# Altium PCB MP3.PcbDoc
Units mil, origin at the board's own origin, x right, y up, seen from the top; angles counter-clockwise.
Board outline 6000 x 4000 mil, 4 copper layers (Top Layer, vcc, gnd, Bottom Layer), stack 23.756 mil thick; 106 components, 156 nets, 529 pads, 47 vias.
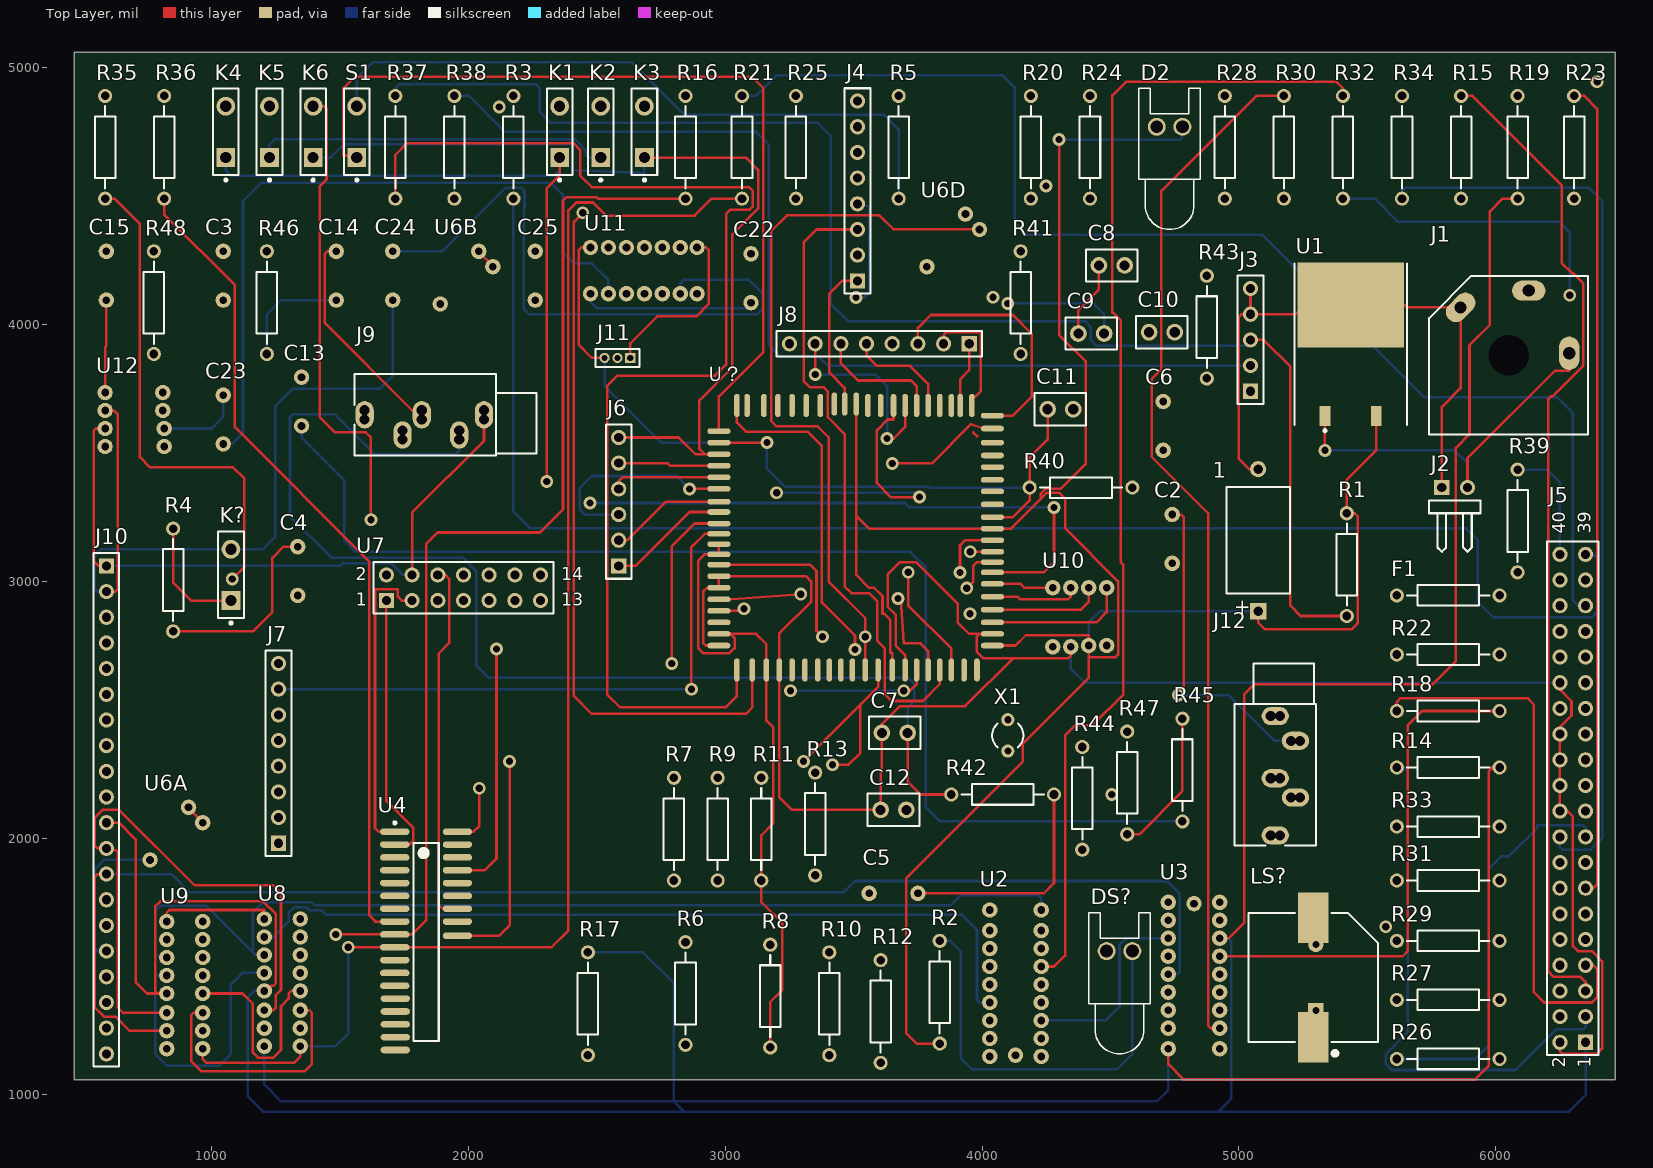
[diagram p0: Top Layer view]
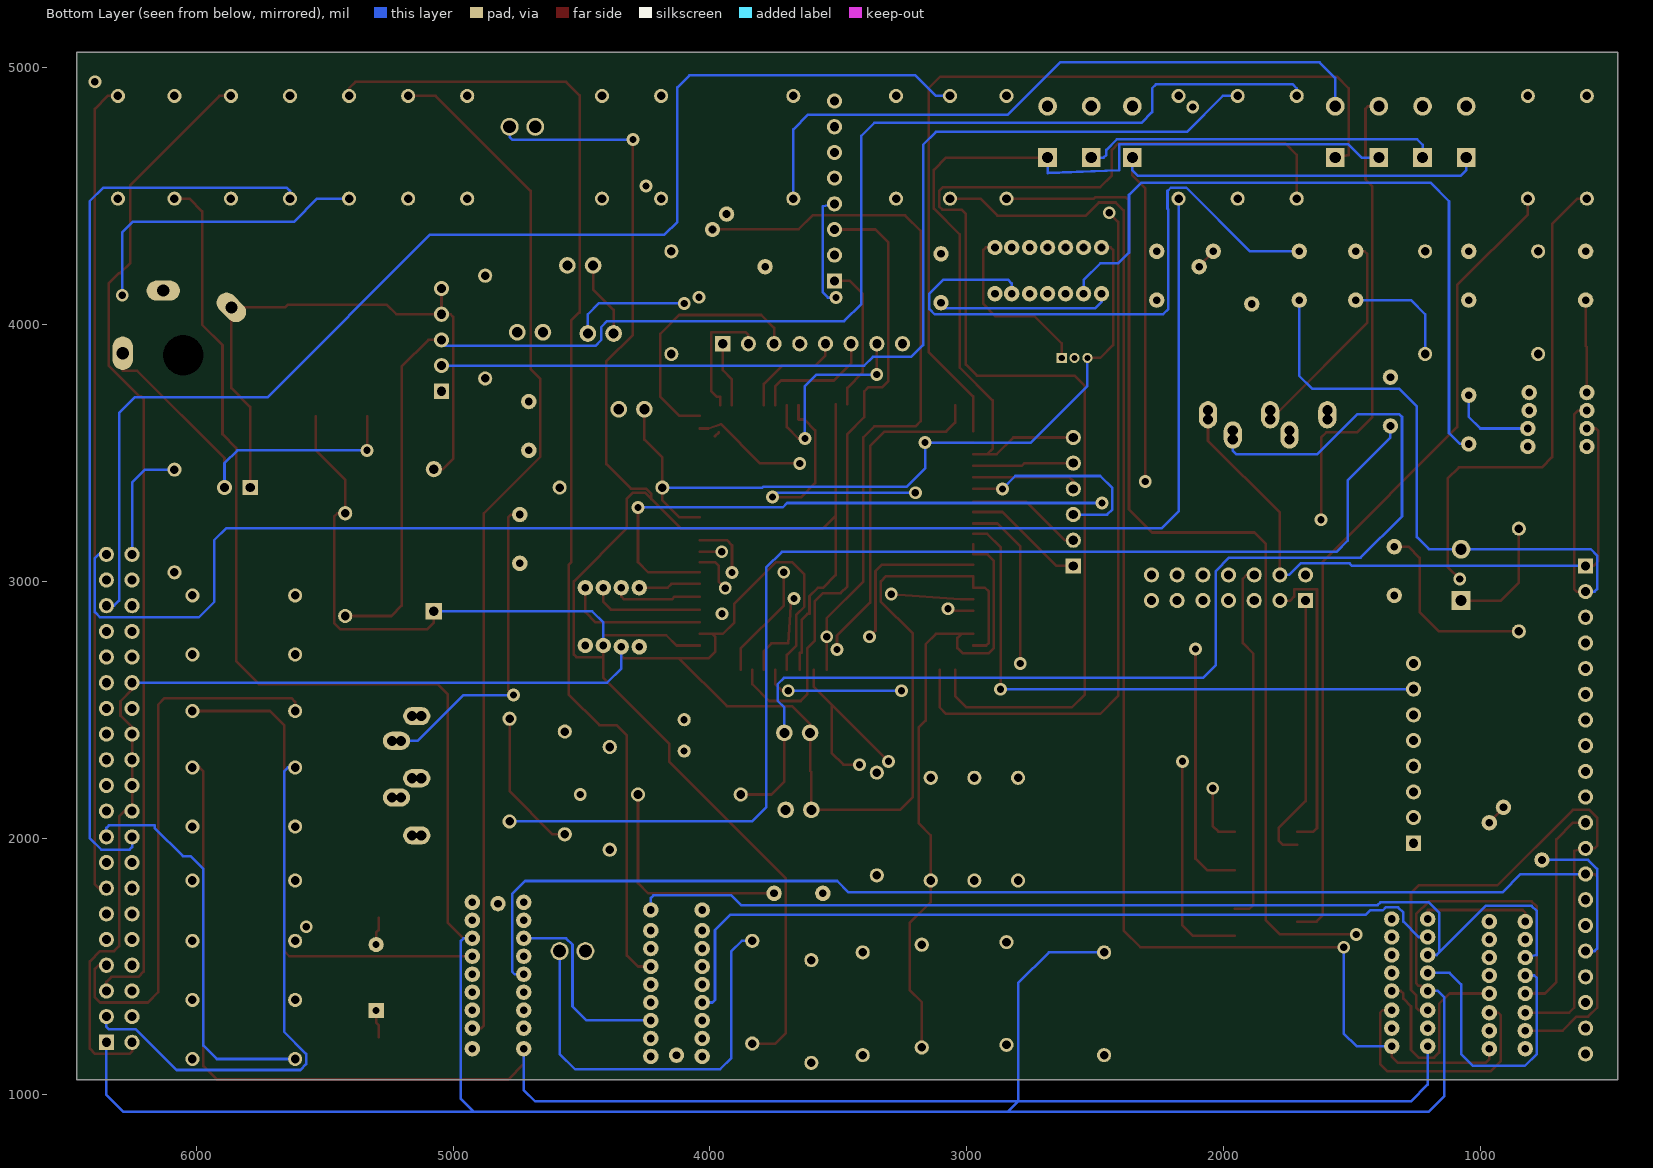
[diagram p1: Bottom Layer view, seen from below]
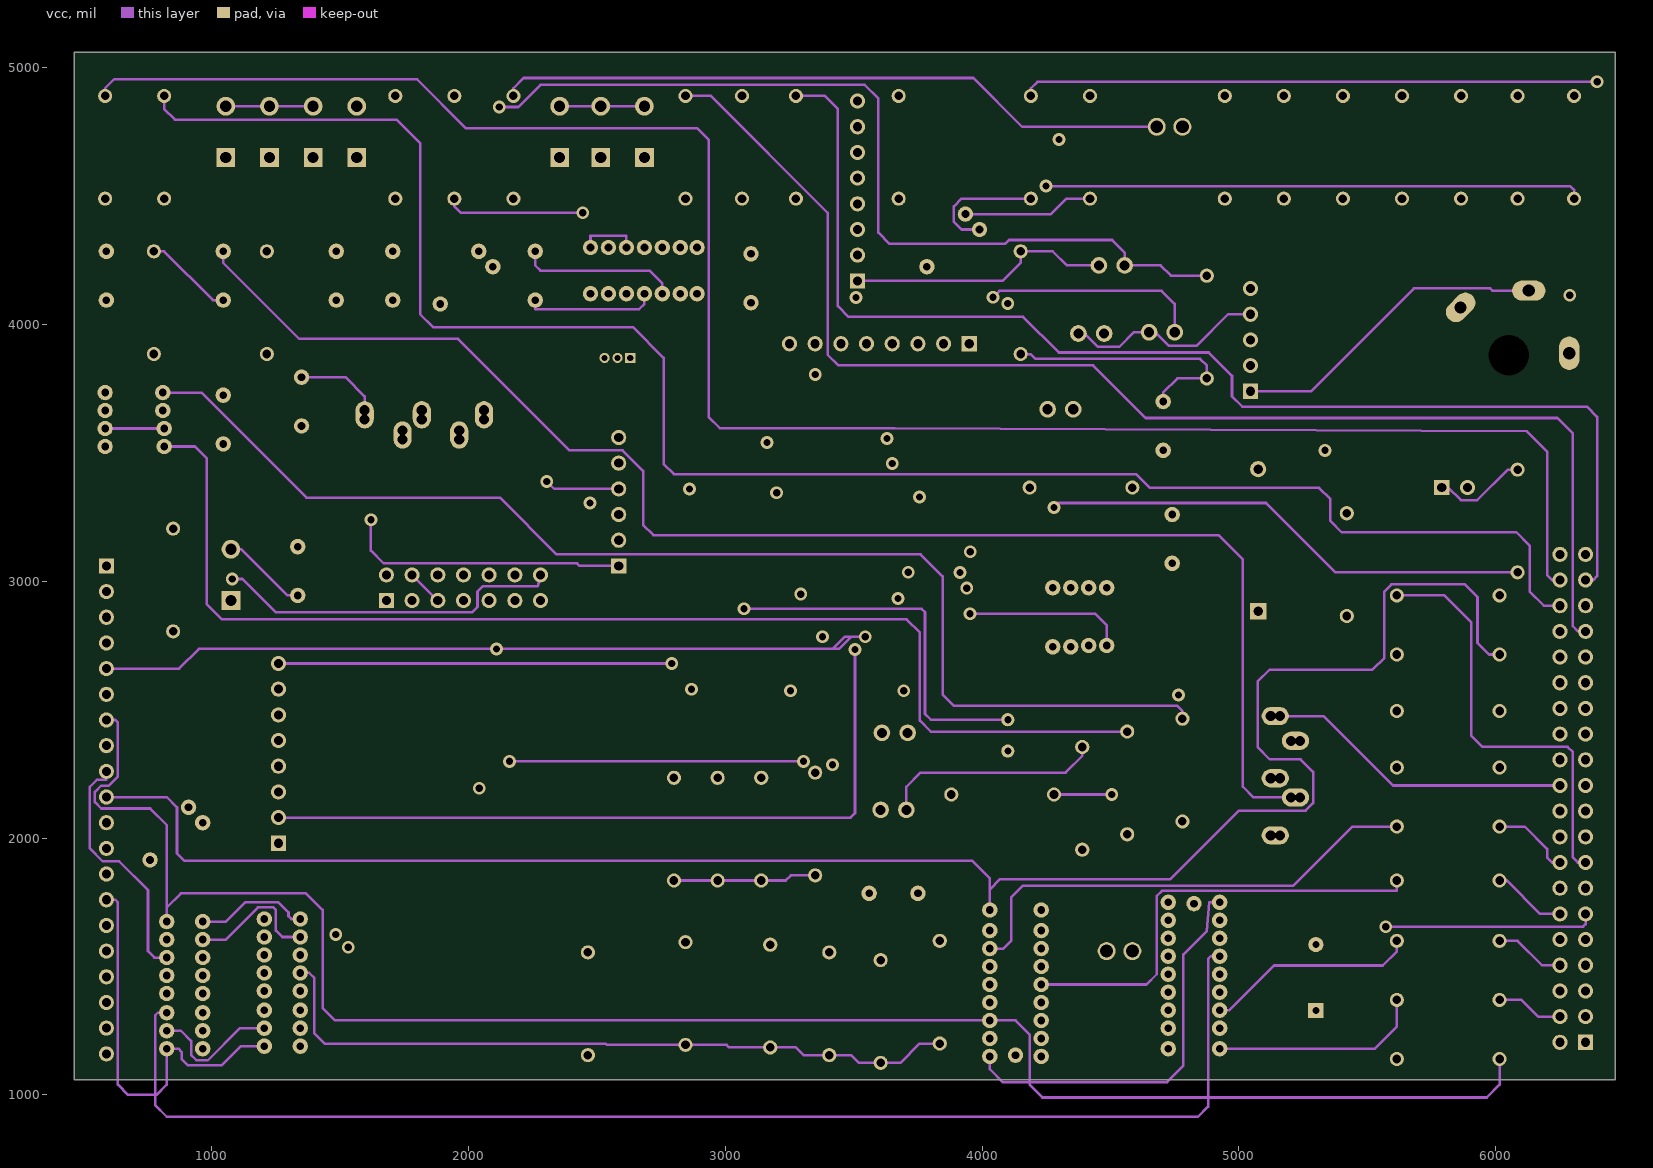
[diagram p2: vcc]
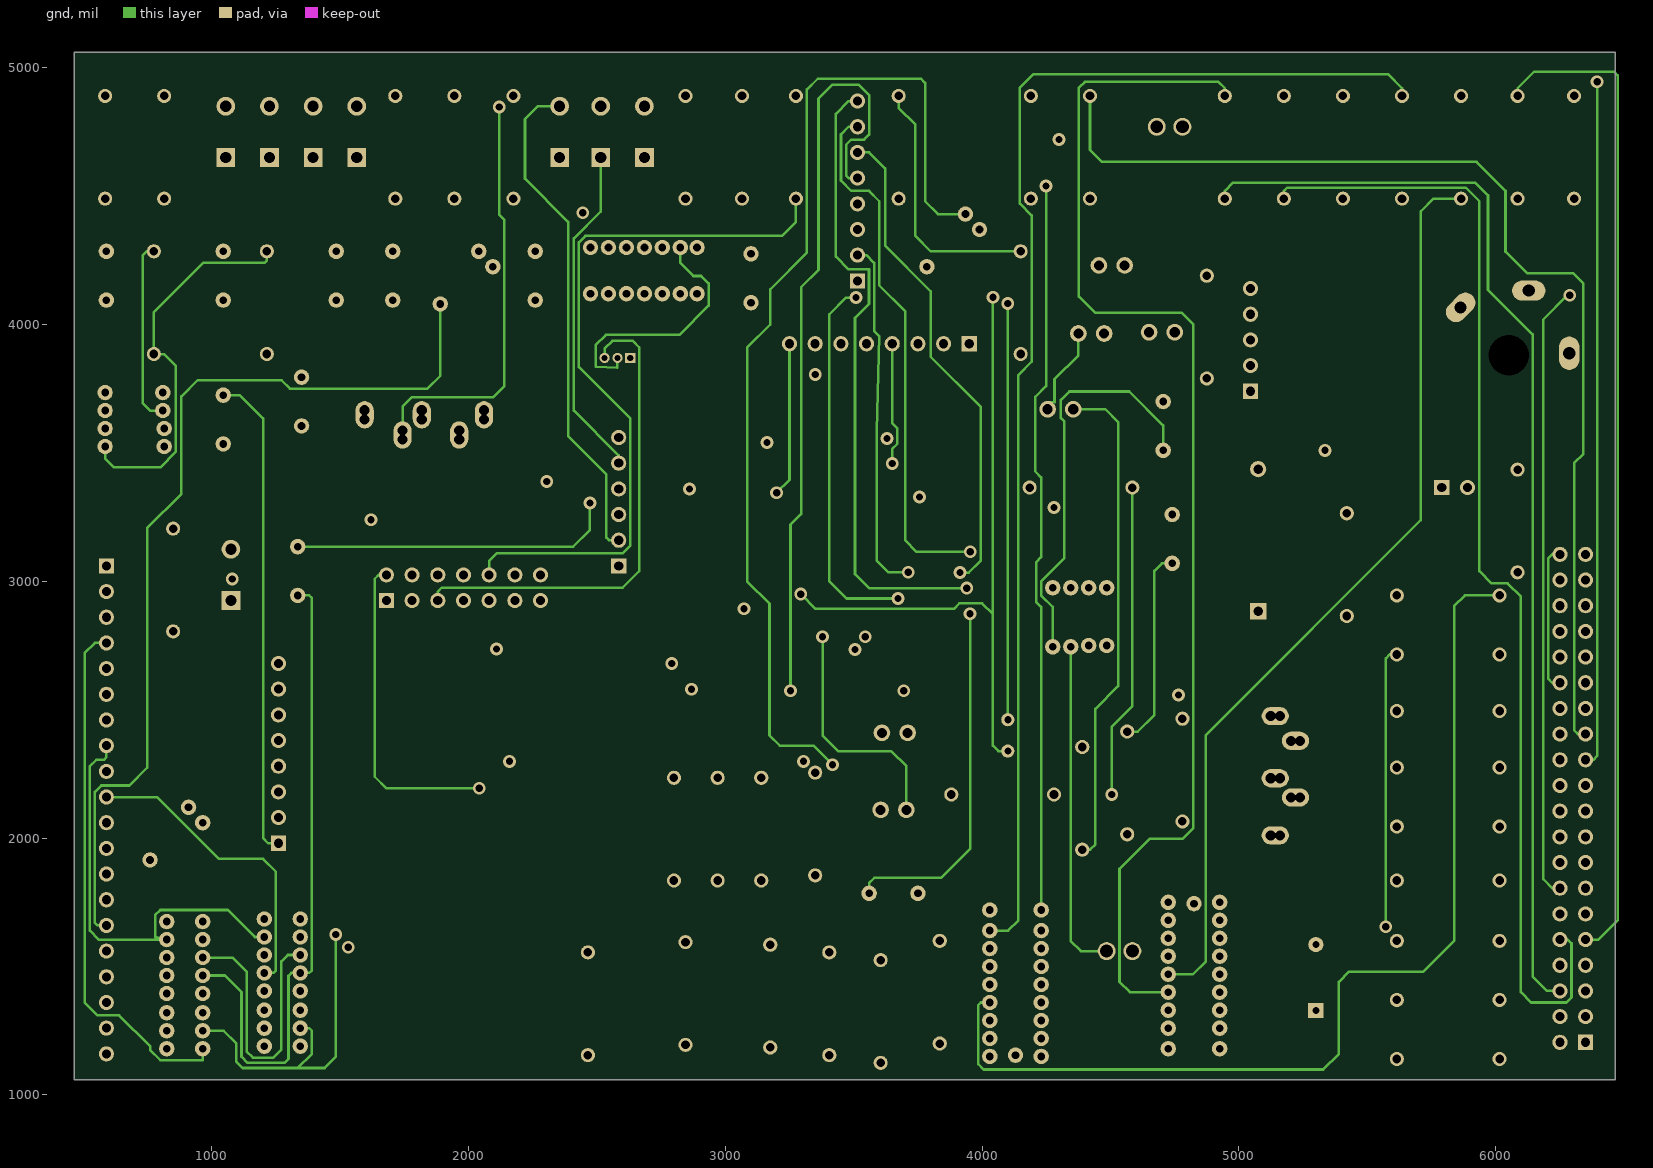
[diagram p3: gnd]

## Layer stack, top to bottom
Top Solder: solder mask 0.4, Solder Resist, Dk 3.5
Top Layer: signal copper 1.4
Dielectric 1: prepreg 2.8, PP-006, Dk 4.1
vcc: signal copper 1.3779
Dielectric1: dielectric 12.6, FR-4, Dk 4.8
gnd: signal copper 1.3779
Dielectric 2: prepreg 2.8, PP-006, Dk 4.1
Bottom Layer: signal copper 1.4
Bottom Solder: solder mask 0.4, Solder Resist, Dk 3.5

## Board outline
465,1060 6465,1060 6465,5060 465,5060

## Design rules (kind name [scope] priority, off if disabled: settings)
Clearance [All] p1: gap=10 ignorepadtopadclearanceinfootprint=FALSE except(0: Arc-Hole Track-Hole SMDPad-Hole THPad-Hole Via-Hole Fill-Hole Poly-Hole Region-Hole Text-Hole)
FabricationTestPointUsage TestPointUsage [All] p1: valid=0 allowmultiple=FALSE
FabricationTestpoint Testpoint [All] p1: side=3 testpointundercomponent=TRUE minsize=40 maxsize=100 preferedsize=60 minholesize=0 maxholesize=40 preferedholesize=32 testpointgrid=1 allowsidetop=TRUE allowsidebottom=TRUE usegrid=TRUE gridtolerance=0.01
PolygonConnect [All] p1: connectstyle=Relief reliefconductorwidth=10 reliefentries=4 polygonreliefangle="90 Angle" airgapwidth=10
RoutingVias [All] p1: holewidth=28 width=50 viastyle="Through Hole" minholewidth=28 minwidth=50 maxholewidth=28 maxwidth=50
SolderMaskExpansion [All] p1: expansion=4
Width [All] p1: maxlimit=10 minlimit=10 preferedwidth=10
28 further rules are at their usual default settings.

## Components (designator, comment, footprint, x,y, rotation, side; value= is the part's Value field where it differs from the comment)
1 "C1" CAPPA14.05-10.5x6.3 5075,3160 r90 top value=1000μF
C2 "1000μ" cap 4740,3160 r0 top
C3 "1000μ" cap 1045,4185 r0 top
C4 "1μF" cap 1335,3035 r0 top
C5 "10μ" cap 3660,1785 r90 top
C6 "10μ" cap 4705,3610 r180 top
C7 "680p" CAPR2.54-5.1x3.2 3660,2410 r0 top value=100pF
C8 "680p" CAPR2.54-5.1x3.2 4505,4230 r0 top value=100pF
C9 "10p" CAPR2.54-5.1x3.2 4425,3965 r0 top value=100pF
C10 "10p" CAPR2.54-5.1x3.2 4700,3970 r0 top value=100pF
C11 "0.01μ" CAPR2.54-5.1x3.2 4305,3670 r0 top value=100pF
C12 "2200p" CAPR2.54-5.1x3.2 3655,2110 r0 top value=100pF
C13 "0.33μ" cap 1350,3695 r0 top
C14 "0.33μ" cap 1485,4185 r0 top
C15 "1μ" cap 590,4185 r0 top
C22 "0.1μ" cap 3100,4175 r0 top
C23 "0.1μ" cap 1045,3625 r0 top
C24 "0.1μ" cap 1705,4185 r0 top
C25 "0.1μ" cap 2260,4185 r0 top
D2 "LED" LED-0 4730,4770 r0 top
DS? "LED0" LED-0 4535,1560 r0 top
F1 "Res2" AXIAL-0.4 5815,2945 r180 top value=1K
J1 "POWER" JACK/6-V3A 6050,3880 r0 top
J2 "POWER1" HDR1X2H 5790,3365 r0 top
J3 "USB" HDR1X5 5045,3740 r90 top
J4 "IO3" HDR1X8 3515,4170 r90 top
J5 "IDE" HDR2X20 6350,1205 r90 top
J6 "KEY" HDR1X6 2585,3060 r90 top
J7 "IO2" HDR1X8 1260,1980 r90 top
J8 "IO1" HDR1X8 3950,3925 r180 top
J9 "LINE OUT" ST-3150-5N 2265,3615 r270 top
J10 "LCD" HDR1X20 590,3060 r270 top
J11 "COM" MHDR1X3 2630,3870 r180 top
J12 "HEADPHONE" ST-3150-5N 5175,2680 r0 top
K1 "K1" SPST-2 2355,4750 r90 top
K2 "K2" SPST-2 2515,4750 r90 top
K3 "K3" SPST-2 2685,4750 r90 top
K4 "K4" SPST-2 1055,4750 r90 top
K5 "K5" SPST-2 1225,4750 r90 top
K6 "K6" SPST-2 1395,4750 r90 top
K? "K4" SPST-2 1075,3025 r90 top
LS? "Buzzer" ABSM-1574 5290,1225 r90 top
R1 "Res2" AXIAL-0.4 5420,3065 r90 top value=1.5K
R2 "Res2" AXIAL-0.4 3835,1400 r90 top value=1K
R3 "Res2" AXIAL-0.4 2175,4690 r90 top value=1K
R4 "1K" AXIAL-0.4 850,3005 r90 top
R5 "Res2" AXIAL-0.4 3675,4690 r90 top value=2.2k
R6 "Res2" AXIAL-0.4 2845,1395 r90 top value=1K
R7 "Res2" AXIAL-0.4 2800,2035 r90 top value=1K
R8 "Res2" AXIAL-0.4 3175,1385 r90 top value=1K
R9 "Res2" AXIAL-0.4 2970,2035 r90 top value=1K
R10 "Res2" AXIAL-0.4 3405,1355 r90 top value=1K
R11 "Res2" AXIAL-0.4 3140,2035 r90 top value=1K
R12 "Res2" AXIAL-0.4 3605,1325 r90 top value=1K
R13 "Res2" AXIAL-0.4 3350,2055 r90 top value=1K
R14 "Res2" AXIAL-0.4 5815,2275 r180 top value=1K
R15 "Res2" AXIAL-0.4 5865,4690 r90 top value=1K
R16 "Res2" AXIAL-0.4 2845,4690 r90 top value=1K
R17 "Res2" AXIAL-0.4 2465,1355 r90 top value=1K
R18 "Res2" AXIAL-0.4 5815,2495 r180 top value=1K
R19 "Res2" AXIAL-0.4 6085,4690 r90 top value=1K
R20 "Res2" AXIAL-0.4 4190,4690 r90 top value=1K
R21 "Res2" AXIAL-0.4 3065,4690 r90 top value=1K
R22 "Res2" AXIAL-0.4 5815,2715 r180 top value=1K
R23 "Res2" AXIAL-0.4 6305,4690 r90 top value=1K
R24 "Res2" AXIAL-0.4 4420,4690 r90 top value=1K
R25 "Res2" AXIAL-0.4 3275,4690 r90 top value=1K
R26 "Res2" AXIAL-0.4 5815,1140 r180 top value=1K
R27 "Res2" AXIAL-0.4 5815,1370 r180 top value=1K
R28 "Res2" AXIAL-0.4 4945,4690 r90 top value=1K
R29 "Res2" AXIAL-0.4 5815,1600 r180 top value=1K
R30 "Res2" AXIAL-0.4 5175,4690 r90 top value=1K
R31 "Res2" AXIAL-0.4 5815,1835 r180 top value=1K
R32 "Res2" AXIAL-0.4 5405,4690 r90 top value=1K
R33 "Res2" AXIAL-0.4 5815,2045 r180 top value=1K
R34 "Res2" AXIAL-0.4 5635,4690 r90 top value=1K
R35 "Res2" AXIAL-0.4 585,4690 r90 top value=1K
R36 "Res2" AXIAL-0.4 815,4690 r90 top value=1K
R37 "27" AXIAL-0.4 1715,4690 r90 top
R38 "Res2" AXIAL-0.4 1945,4690 r90 top value=27
R39 "27" AXIAL-0.4 6085,3235 r90 top
R40 "56K" AXIAL-0.4 4385,3365 r180 top
R41 "56K" AXIAL-0.4 4150,4085 r90 top
R42 "2.4K" AXIAL-0.4 4080,2170 r180 top
R43 "2.4K" AXIAL-0.4 4875,3990 r90 top
R44 "100" AXIAL-0.4 4390,2155 r90 top
R45 "20K" AXIAL-0.4 4780,2265 r90 top
R46 "20K" AXIAL-0.4 1215,4085 r90 top
R47 "20K" AXIAL-0.4 4565,2215 r90 top
R48 "20K" AXIAL-0.4 775,4085 r90 top
S1 "PRG" SPST-2 1565,4750 r90 top
U1 "LM1117" SIP-G3/Y2 5435,3860 r0 top
U2 "74HC373" 74HC373 4125,1225 r180 top
U3 "74HC373" 74HC373 4830,1675 r0 top
U4 "62256" SOJ127P870X356-26M 1835,1640 r0 top
U6A "74HC00" 74HC00 840,2000 r0 top
U6B "74HC00" 74HC00 1970,4165 r0 top
U6D "74HC00" 74HC00 3865,4310 r0 top
U7 "74HC138" HDR2X7 1680.4,2925 r0 top
U8 "K9FXX08UOD" U8 1275,1500 r0 top
U9 "K9FXX08UOD" U8 895,1490 r0 top
U10 "CS4331" CS4331 4385,2860 r270 top
U11 "" U11 2625,4215 r90 top
U12 "LM4881-MSOP" CS4331 700,3635 r0 top
U？ "AT89C51" QFP65P1720X2320X245-100M 3350,3260 r0 top
X1 "20.000MHZ" BCY-W2/D3.1 4100,2400 r0 top

## Footprints (in the part's own frame and the unit in brackets; to place one, negate y for a bottom-side part, rotate by r counter-clockwise, add the part's x,y. Pads: shape width x height; smd on the part's side, far side on the other; paste and mask are expansions set on the pad)
74HC00 [mil]
  round 60 hole 30: 1(-80,-85) 2(70,120) 3(125,60)
74HC373 [mil]
  round 60 hole 30: 1(95,75) 2(95,5) 3(95,-65) 4(95,-135) 5(95,-205) 6(95,-275) 7(95,-345) 8(95,-415) 9(-105,75) 10(-105,5) 11(-105,-65) 12(-105,-135) 13(-105,-205) 14(-105,-275) 15(-105,-345) 16(-105,-415) 17(-105,-495) 18(95,-495) 19(-5,70)
  body extent -143,-545 138,115, height 10
ABSM-1574 [mm] "Magnetic Transducer Buzzer"
  rect 5x3 smd: 1(0,0) 2(11.8,0)
  rect 1.5x1.5 hole 0.7: 1A(2.65,-0.24)
  round 1.5 hole 0.7: 2A(9.15,-0.24)
  silkscreen extent -1.83,-6.4 12.3,6.4
AXIAL-0.4 [mm] "Resistor; 2 Leads"
  round 1.4 hole 0.85: 1(-5.08,0) 2(5.08,0)
  silkscreen extent -4.06,-1.02 4.06,1.02
BCY-W2/D3.1 [mm] "Crystal, Thru-Hole; 2 Leads; Body 3.1 x 8.2 mm (Dia.xH)"
  round 1.3 hole 0.7: 1(0,1.55) 2(0,-1.55)
  silkscreen extent -1.55,-1.19 1.55,1.17
cap [mil]
  round 60 hole 30: 0(0,100) 1(0,-90)
CAPPA14.05-10.5x6.3 [mm] "Capacitor, Axial, Polarised; Body 10.5 x 6.3 mm (LxDia. max), Lead Dia. 0.6 mm (typ)"
  rect 1.6x1.6 hole 0.95: 1(-7.025,0)
  round 1.6 hole 0.95: 2(7.025,0)
  silkscreen extent -5.25,-3.15 5.25,3.15
CAPR2.54-5.1x3.2 [mm] "Capacitor, Ceramic, Thru-Hole, Dipped Radial; Body 5.1 x 3.2 mm (WxT) Pin Spacing 2.54 mm (typ)"
  round 1.65 hole 1: 1(-1.27,0) 2(1.27,0)
  silkscreen extent -2.55,-1.6 2.55,1.6
CS4331 [mil]
  round 60 hole 30: 1(-115,100) 2(-115,30) 3(-115,-40) 4(-115,-110) 5(115,-110) 6(115,-40) 7(110,30) 8(110,100)
HDR1X2H [mm] "Connector; Header; 2 Position; Right Angle"
  rect 1.5x1.5 hole 0.9: 1(0,0)
  round 1.5 hole 0.9: 2(2.54,0)
  silkscreen extent -1.27,-6.35 3.81,-1.27
HDR1X5 [mm] "Connector; Header; 5 Position"
  rect 1.5x1.5 hole 0.9: 1(0,0)
  round 1.5 hole 0.9: 2(2.54,0) 3(5.08,0) 4(7.62,0) 5(10.16,0)
  silkscreen extent -1.27,-1.27 11.43,1.27
HDR1X6 [mm] "Connector; Header; 6 Position"
  rect 1.5x1.5 hole 0.9: 1(0,0)
  round 1.5 hole 0.9: 2(2.54,0) 3(5.08,0) 4(7.62,0) 5(10.16,0) 6(12.7,0)
  silkscreen extent -1.27,-1.27 13.97,1.27
HDR1X8 [mm] "Connector; Header; 8 Position"
  rect 1.5x1.5 hole 0.9: 1(0,0)
  round 1.5 hole 0.9: 2(2.54,0) 3(5.08,0) 4(7.62,0) 5(10.16,0) 6(12.7,0) 7(15.24,0) 8(17.78,0)
  silkscreen extent -1.27,-1.27 19.05,1.27
HDR1X20 [mm] "Connector; Header; 20 Position"
  rect 1.5x1.5 hole 0.9: 1(0,0)
  round 1.5 hole 0.9: 2(2.54,0) 3(5.08,0) 4(7.62,0) 5(10.16,0) 6(12.7,0) 7(15.24,0) 8(17.78,0) 9(20.32,0) 10(22.86,0) 11(25.4,0) 12(27.94,0) 13(30.48,0) 14(33.02,0) 15(35.56,0) 16(38.1,0) 17(40.64,0) 18(43.18,0) 19(45.72,0) 20(48.26,0)
  silkscreen extent -1.27,-1.27 49.53,1.27
HDR2X7 [mm] "Connector; Header; 7x2 Position"
  rect 1.5x1.5 hole 0.9: 1(0,0)
  round 1.5 hole 0.9: 2(0,2.54) 3(2.54,0) 4(2.54,2.54) 5(5.08,0) 6(5.08,2.54) 7(7.62,0) 8(7.62,2.54) 9(10.16,0) 10(10.16,2.54) 11(12.7,0) 12(12.7,2.54) 13(15.24,0) 14(15.24,2.54)
  silkscreen extent -1.27,-1.27 16.51,3.81
HDR2X20 [mm] "Connector; Header; 20x2 Position"
  rect 1.5x1.5 hole 0.9: 1(0,0)
  round 1.5 hole 0.9: 2(0,2.54) 3(2.54,0) 4(2.54,2.54) 5(5.08,0) 6(5.08,2.54) 7(7.62,0) 8(7.62,2.54) 9(10.16,0) 10(10.16,2.54) 11(12.7,0) 12(12.7,2.54) 13(15.24,0) 14(15.24,2.54) 15(17.78,0) 16(17.78,2.54) 17(20.32,0) 18(20.32,2.54) 19(22.86,0) 20(22.86,2.54) 21(25.4,0) 22(25.4,2.54) 23(27.94,0) 24(27.94,2.54) 25(30.48,0) 26(30.48,2.54) 27(33.02,0) 28(33.02,2.54) 29(35.56,0) 30(35.56,2.54) 31(38.1,0) 32(38.1,2.54) 33(40.64,0) 34(40.64,2.54) 35(43.18,0) 36(43.18,2.54) 37(45.72,0) 38(45.72,2.54) 39(48.26,0) 40(48.26,2.54)
  silkscreen extent -1.27,-1.27 49.53,3.81
JACK/6-V3A [mm] "Connector; Jack Socket, 1/4\" [6.5mm], Thru-Hole, 3 Position, Vertical, Body 15.7 x 15.7 x 31 mm (WxTxH)"
  oval 2x3.3 hole 1.2: 1(6,0.2)
  oval 3.3x2 hole 1.2: 2(2,6.4)
  oval 2x3.3 hole 1.2 rot 135: 5(-4.738,4.738)
  round 3.7 hole 4: MH1(0,0)
  silkscreen extent -7.85,-7.85 7.85,7.85
LED-0 [mil] "Typical INFRARED GaAs LED; 2 Leads"
  round 70 hole 50: 1(50,0) 2(-50,0)
  silkscreen extent -120,-400 120,150
MHDR1X3 [mm] "Connector; Header; 3 Position"
  rect 1x1 hole 0.6: 1(0,0)
  round 1 hole 0.6: 2(1.27,0) 3(2.54,0)
  silkscreen extent -0.9,-0.9 3.44,0.9
QFP65P1720X2320X245-100M [mm] "QFP, 100-Leads, Body 14.00x20.00mm, Pitch 0.65mm, IPC Low Density"
  oval 2.3x0.55 smd: 1(-9.525,8.255) 2(-9.525,7.112) 3(-9.525,5.969) 4(-9.525,4.826) 5(-9.525,3.683) 6(-9.525,2.54) 7(-9.525,1.27) 8(-9.525,0.254) 9(-9.525,-0.889) 10(-9.525,-1.905) 11(-9.525,-2.921) 12(-9.525,-3.937) 13(-9.525,-4.953) 14(-9.525,-6.096) 15(-9.525,-7.239) 16(-9.525,-8.382) 17(-9.525,-9.525) 18(-9.525,-10.668) 19(-9.525,-11.811) 20(-9.525,-12.954) 41(17.526,-12.954) 42(17.526,-11.811) 43(17.526,-10.668) 44(17.526,-9.398) 45(17.526,-8.128) 46(17.526,-6.858) 47(17.526,-5.715) 48(17.526,-4.699) 49(17.526,-3.683) 50(17.526,-2.54) 51(17.526,-1.397) 52(17.526,-0.254) 53(17.526,1.016) 54(17.526,2.286) 55(17.526,3.429) 56(17.526,4.699) 57(17.526,5.842) 58(17.526,7.112) 59(17.526,8.509) 60(17.526,9.779)
  oval 0.55x2.3 smd: 21(-7.747,-15.367) 22(-6.223,-15.367) 23(-4.826,-15.367) 24(-3.556,-15.367) 25(-2.286,-15.367) 26(-1.016,-15.367) 27(0.254,-15.367) 28(1.397,-15.367) 29(2.54,-15.367) 30(3.683,-15.367) 31(4.953,-15.367) 32(6.223,-15.367) 33(7.62,-15.367) 34(8.89,-15.367) 35(10.033,-15.367) 36(11.176,-15.367) 37(12.319,-15.367) 38(13.462,-15.367) 39(14.732,-15.367) 40(16.002,-15.367) 61(15.494,10.795) 62(14.351,10.795) 63(13.462,10.795) 64(12.319,10.795) 65(11.176,10.795) 66(10.033,10.795) 67(8.89,10.795) 68(7.747,10.795) 69(6.477,10.795) 70(5.207,10.795) 71(4.064,10.922) 72(2.921,10.922) 73(1.905,10.922) 74(0.508,10.795) 75(-0.889,10.795) 76(-2.286,10.795) 77(-3.683,10.795) 78(-5.08,10.795) 79(-6.731,10.795) 80(-7.747,10.795)
  Top Layer lines w0.254: 15.621,8.128 16.002,7.747
SIP-G3/Y2 [mm] "D2-PAK/TO-263-AB; 3 Leads (1 Cropped); Body 15.5 (inc. leads) x 10.5 mm (LxW max)"
  rect 1.05x2 smd: 1(-2.54,-5.5) 3(2.54,-5.5)
  rect 10.55x8.4 smd: 2(0,5.5)
  silkscreen extent -5.57,-7.07 5.57,9.6
SOJ127P870X356-26M [mm] "SOJ, 26-Leads, Body 13.00x8.66mm, Pitch 1.27mm, IPC Low Density"
  oval 2.9x0.65 smd: 1(-3.1,9.779) 2(-3.1,8.509) 3(-3.1,7.239) 4(-3.1,5.969) 5(-3.1,4.699) 6(-3.1,3.429) 7(-3.1,2.159) 8(-3.1,0.889) 9(-3.1,-0.381) 10(-3.1,-1.651) 11(-3.1,-2.921) 12(-3.1,-4.191) 13(-3.1,-5.461) 14(-3.048,-11.811) 15(-3.048,-10.541) 16(-3.048,-9.271) 17(-3.048,-8.001) 18(-3.048,-6.731) 19(3.1,0.889) 20(3.1,2.159) 21(3.1,3.429) 22(3.1,4.699) 23(3.1,5.969) 24(3.1,7.239) 25(3.1,8.509) 26(3.1,9.779) 27(3.1,-0.508)
  silkscreen extent -3.22,-10.92 1.25,10.78, body extent -2.54,-3.81 2.54,1.27, height 1.27
SPST-2 [mm] "Circuit Breaker; 2 Leads"
  rect 1.85x1.85 hole 1.1: 1(-2.54,0)
  round 1.85 hole 1.1: 2(2.54,0)
  silkscreen extent -4.89,-1.27 4.28,1.27
ST-3150-5N [mm] "Connector; Stereo Jack, 3.5mm, 5 Position"
  oval 2.7x1.8 all layers, no hole: 1(-0.85,-5.2) 2(1.15,-7.65) 3(-0.85,-11.35) 4(1.15,-13.25) 5(-0.85,-17)
  round 1.2 hole 1: 1A(-1.3,-5.2) 1B(-0.4,-5.2) 2A(0.7,-7.65) 2B(1.6,-7.65) 3A(-1.3,-11.35) 3B(-0.4,-11.35) 4A(0.7,-13.25) 4B(1.6,-13.25) 5A(-1.3,-17) 5B(-0.4,-17)
  silkscreen extent -4.9,-18 3.2,0
U8 [mil]
  round 60 hole 30: 1(-70,185) 3(-70,115) 5(-70,45) 7(-70,-25) 9(-70,-95) 11(-70,-170) 13(-70,-240) 15(-70,-310) 17(70,-310) 19(70,-240) 21(70,-170) 23(70,-95) 25(70,-25) 27(70,45) 29(70,115) 31(70,185)
U11 [mil]
  round 60 hole 30: 1(-95,150) 2(-95,80) 3(-95,10) 4(-95,-60) 5(-95,-130) 6(-95,-200) 7(-95,-265) 8(85,150) 9(85,80) 10(85,10) 11(85,-60) 12(85,-130) 13(85,-200) 14(85,-265)

## Part data
1: library part "Cap Pol2", "Polarized Capacitor (Axial)", LatestRevisionDate=17-Jul-2002, LatestRevisionNote="Re-released for DXP Platform.", Published=8-Jun-2000, Publisher="Altium Limited"
C2 C3 C4 C5 C6 C13 C14 C15: library part CAP1
C7 C8 C9 C10 C11 C12: library part Cap, "Capacitor", LatestRevisionDate=17-Jul-2002, LatestRevisionNote="Re-released for DXP Platform.", Published=8-Jun-2000, Publisher="Altium Limited"
C22 C23 C24 C25: library part Cap
D2: library part LED0, "Typical INFRARED GaAs LED", LatestRevisionDate=17-Jul-2002, LatestRevisionNote="Re-released for DXP Platform.", Published=8-Jun-2000, Publisher="Altium Limited"
DS?: "Typical INFRARED GaAs LED", LatestRevisionDate=17-Jul-2002, LatestRevisionNote="Re-released for DXP Platform.", Published=8-Jun-2000, Publisher="Altium Limited"
F1 R1 R2 R3 R5 R6 R7 R8 R9 R10 R11 R12 R13 R14 R15 R16 R17 R18 R19 R20 R21 R22 R23 R24 R25 R26 R27 R28 R29 R30 R31 R32 R33 R34 R35 R36 R38: "Resistor", LatestRevisionDate=17-Jul-2002, LatestRevisionNote="Re-released for DXP Platform.", Published=8-Jun-2000, Publisher="Altium Limited"
J1: library part "Phonejack2 TN", "Jack Socket, 1/4\" [6.5mm], Thru-Hole, Vertical, 2-Conductor with Tip closed", PackageDocument=2003, DatasheetDocument=2003, DrillAndSlotSize="Corresponds to nominal value.", LatestRevisionDate=15-Jul-2004, LatestRevisionNote="Component Replaced & renamed from \"Phonejack\".", PackageReference=S1VS_SNB, PCB_Layout="Complies with manufacturer's recommendation.", Publisher="Altium Limited"
J2: library part "Header 2H", "Header, 2-Pin, Right Angle", LatestRevisionDate=17-Jul-2002, LatestRevisionNote="Re-released for DXP Platform.", Publisher="Altium Limited"
J3: library part "Header 5", "Header, 5-Pin", LatestRevisionDate=17-Jul-2002, LatestRevisionNote="Re-released for DXP Platform.", Publisher="Altium Limited"
J4 J7 J8: library part "Header 8", "Header, 8-Pin", LatestRevisionDate=17-Jul-2002, LatestRevisionNote="Re-released for DXP Platform.", Publisher="Altium Limited"
J5: library part "Header 20X2", "Header, 20-Pin, Dual row", LatestRevisionDate=17-Jul-2002, LatestRevisionNote="Re-released for DXP Platform.", Publisher="Altium Limited"
J6: library part "Header 6", "Header, 6-Pin", LatestRevisionDate=17-Jul-2002, LatestRevisionNote="Re-released for DXP Platform.", Publisher="Altium Limited"
J9 J12: library part "Phonejack Stereo SW", "3-Conductor Jack with 2 break contacts (normals) and 2 auxiliary make contacts", DatasheetDocument=07-Mar-2000, LatestRevisionDate=17-Dec-2003, LatestRevisionNote="PCB Footprint replaced.", Published=5-Jan-2004, Publisher="Altium Limited"
J10: library part "Header 20", "Header, 20-Pin", LatestRevisionDate=17-Jul-2002, LatestRevisionNote="Re-released for DXP Platform.", Publisher="Altium Limited"
J11: library part MHDR1X3, "Header, 3-Pin", LatestRevisionDate=17-Jul-2002, LatestRevisionNote="Re-released for DXP Platform.", Publisher="Altium Limited"
K1 K2 K3 K4 K5 K6 K?: library part SW-PB, "Switch", LatestRevisionDate=17-Jul-2002, LatestRevisionNote="Re-released for DXP Platform.", Published=24-Mar-1999, Publisher="Altium Limited"
LS?: "Magnetic Transducer Buzzer", DatasheetDocument=17-Dec-2003, LatestRevisionDate=17-Dec-2003, LatestRevisionNote="Schematic revised, PCB Footprint replaced.", Published=24-Mar-1999, Publisher="Altium Limited"
R4 R37 R39 R40 R41 R42 R43 R44 R45 R46 R47 R48: library part Res2, "Resistor", LatestRevisionDate=17-Jul-2002, LatestRevisionNote="Re-released for DXP Platform.", Published=8-Jun-2000, Publisher="Altium Limited"
  R4 R37 R40 R41 R42 R43 R44 R45 R46 R47 R48: 27=27
  R39: 27=8.2K
S1: library part SW-SPST, "Single-Pole, Single-Throw Switch", LatestRevisionDate=17-Jul-2002, LatestRevisionNote="Re-released for DXP Platform.", Published=24-Mar-1999, Publisher="Altium Limited"
U1: library part "Volt Reg", "Voltage Regulator", Code_JEDEC=SMD-220, LatestRevisionDate=17-Jul-2002, LatestRevisionNote="Re-released for DXP Platform.", Published=24-Mar-1999, Publisher="Altium Limited"
U2 U3: library part U?
U7: library part "Header 7X2", "Header, 7-Pin, Dual row", LatestRevisionDate=17-Jul-2002, LatestRevisionNote="Re-released for DXP Platform.", Publisher="Altium Limited"
U8 U9: library part MHDR2X16, "Header, 16-Pin, Dual row", LatestRevisionDate=17-Jul-2002, LatestRevisionNote="Re-released for DXP Platform.", Publisher="Altium Limited"
U11: library part U11
U12: library part CS4331
X1: library part XTAL, "Crystal Oscillator", LatestRevisionDate=17-Jul-2002, LatestRevisionNote="Re-released for DXP Platform.", Published=8-Jun-2000, Publisher="Altium Limited"

## Via types
v1: diameter 50, hole 28, Top Layer to Bottom Layer, 47 vias

## Nets (pads, with @x,y where several pads share a name; then routed paths per layer and width w, separated by ;. In a path a pad name is that pad's centre, name@x,y a point inside that pad or via, vN(x,y) a via of type N, cw(c..) or ccw(c..) an arc to the next point about the centre after c; other vN are vias at no path point)
A0: J10.4 R21.1 U4.10 U8.17 U9.17 | length 7513.1
  Top Layer w10: U9.17 965,1140 980,1125 1320,1125 1345,1150 U8.17 ; v1(1532,1575) U4.10 2324,1575 2389,1640 2389,4444 2420,4475 2485,4475 2536,4424 2880,4424 2946,4490 R21.1
  gnd w10: J10.4 545,2760 505,2720 505,1360 555,1310 640,1310 760,1190 760,1175 800,1135 965,1135 U9.17
  Bottom Layer w10: U8.17 1482,1190 1532,1240 v1(1532,1575)
A1: R16.1 U4.9 U8.19 U9.19 | length 5447.1
  Top Layer w10: v1(1483,1625) U4.9 1780,1625 1835,1680 1835,3145 1880,3190 2278,3190 2368,3280 2368,4483 2380,4495 2500,4495 2505,4490 R16.1
  gnd w10: U9.19 1046,1250 1096,1200 1096,1129 1120,1105 1335,1105 ; U8.19 1380,1260 1390,1250 1390,1160 1335,1105 ; v1(1483,1625) 1483,1148 1440,1105 1335,1105
A2: R36.1 U4.8 | length 3230.8
  Top Layer w10: R36.1 815,4428 1090,4153 1090,3600 1613,3077 1613,1700 1638,1675 U4.8
A3: U4.7
A4: U4.6
A5: U4.5
A6: U4.4
A7: U4.3
A8: U4.25
A9: U4.24
A10: U4.21
A11: J10.5 R20.1 U4.23 U6D.3 U？.31 | length 7382.2
  Top Layer w10: U4.23 2064,1875 2109,1920 v1(2109,2737) ; U？.31 v1(3545,2784) 3545,2857 3402,3000 3402,3561 3360,3603 3200,3603 3179,3624 3179,4364 3240,4425 3600,4425 3654,4371 U6D.3
  vcc w10: J10.5 873,2660 950,2737 v1(2109,2737) 3418,2737 ; v1(3545,2784) 3489,2784 ; U6D.3 3920,4370 3890,4400 3890,4460 3920,4490 R20.1 ; 3418,2737 3442,2737 3489,2784 ; 3418,2737 3465,2784 3489,2784
A12: U4.2 U7.1 | length 1056.6
  Top Layer w10: U7.1 1680.4,2144.64 1785.04,2040 1785.04,1990 1770.04,1975 U4.2
A13: U4.26 U7.2 | length 1489.3
  Top Layer w10: U4.26 2020,2025 2042,2047 v1(2042,2194)
  gnd w10: U7.2 1650,3025 1635,3010 1635,2239 1680,2194 v1(2042,2194)
A14: U4.1 U7.3 | length 1193.6
  Top Layer w10: U4.1 1650,2025 1635.87,2039.13 1635.87,2969.53 1725,2969.53 1725,2940 1740,2925 U7.3
A15: U4.20 U7.6 | length 1417.1
  Top Layer w10: U7.6 1910,3025 1925,3010 1925,2759 1884,2718 1884,1740 1899,1725 U4.20
D0: J10.7 R26.1 U2.3 U8.1 U9.1 | length 7560.8
  Top Layer w10: U9.1 825,1710 835,1720 1205,1720 U8.1
  vcc w10: J10.7 625,2460 635,2450 635,2239.53 600,2204.53 570,2204.53 545.47,2180 545.47,2140 570,2115.47 760,2115.47 825,2050.47 825,1730 ; U9.1 825,1730 ; R26.1 6015,1040 5965,990 4235,990 4185,1040 4185,1235 4130,1290 U2.3 1480,1290 1432,1338 1432,1720 1367,1785 880,1785 825,1730
D1: F1.1 J10.8 U2.4 U8.3 U9.3 | length 8901.7
  gnd w10: J10.8 590,2315 580,2305 550.47,2305 525.47,2280 525.47,1639.53 560,1605 U9.3 780,1615 780,1700 800,1720 1063,1720 1168,1615 U8.3 ; U2.4 3995,1360 3985,1350 3985,1120 4006,1099 5328,1099 5389,1160 5389,1440 5429,1480 5718,1480 5838,1600 5838,2903 5880,2945 F1.1
  Bottom Layer w10: U8.3 1240,1615 1300,1675 1300,1710 1320,1730 1369,1730 1380,1719 1429,1719 1446,1702 3920,1702 3980,1642 3980,1370 3990,1360 U2.4
D2: J10.9 R23.1 U2.17 U8.5 U9.5 | length 9964.9
  vcc w10: J10.9 590,2227 552.47,2227 525.47,2200 525.47,1960 575.47,1910 640,1910 752,1798 752,1560 777,1535 U9.5 ; v1(4249,4539) 6290,4539 6305,4524 R23.1
  gnd w10: U2.17 4230,2900 4210,2920 4210,3073.95 4230,3093.95 4230,3405 4207,3428 4207,3718 4249,3760 v1(4249,4539)
  Bottom Layer w10: U9.5 780,1545 780,1716 800,1736 979,1736 1160,1555 ; U8.5 1170,1545 1160,1555 ; U2.17 4230,1767 4220,1777 3916,1777 3878,1739 1399.89,1739 1388.89,1750 1200,1750 1160,1710 1160,1555
D3: J10.10 R22.1 U2.18 U8.7 U9.7 | length 9608.6
  vcc w10: J10.10 825,2160 865,2120 865,1940 893,1912 3960,1912 4030,1842 4030,1800 ; U2.18 4030,1800 ; R22.1 5974,2715 5929,2760 5929,2939 5880,2988 5594,2988 5566,2960 5566,2702 5520,2656 5120,2656 5073,2609 5073,2354 5120,2307 5240,2307 5289,2258 5289,2136 5260,2107 5000,2107 4733,1840 4070,1840 4030,1800
  gnd w10: J10.10 787,2160 1028,1919 1200,1919 1250,1869 1250,1485 1240,1475 U8.7
  Bottom Layer w10: U9.7 790,1465 780,1455 780,1160 827,1113 1028,1113 1075,1160 1075,1430 1120,1475 U8.7
D4: J10.11 R19.1 U3.3 U8.9 U9.9 | length 10838.6
  Top Layer w10: J10.11 639,2060 704,1995 704,1440 749,1395 790,1395 ; U9.9 790,1395 ; U8.9 1230,1405 1230,1425 1240,1425 1250,1435 1250,1704 1200,1754 800,1754 780,1734 780,1405 790,1395 ; U3.3 4960,1610 5020,1670 5020,2560 5060,2600 5756,2600 5845,2689 5845,3520 5898,3573 5898,3920 5977,3999 5977,4440 6027,4490 R19.1
  Bottom Layer w10: U8.9 1165,1405 1140,1380 1140,995 1200,935 4920,935 4970,985 4970,1600 4960,1610 U3.3
D5: J10.12 R18.1 U3.4 U8.11 U9.11 | length 9548.4
  Top Layer w10: U9.11 654.53,1320 635,1339.53 635,1950 J10.12 555,1960 545,1970 545,2080 575,2110 640,2110 934,1816 1240,1816 1270,1786 1270,1409 1250,1389 1250,1340 1240,1330 U8.11 ; U3.4 5638,1540 5658,1560 5658,2440 5713,2495 R18.1
  vcc w10: U9.11 790,1320 780,1310 780,960 825,915 4840,915 4880,955 4880,1530 4890,1540 U3.4
D6: J10.13 R15.1 U3.13 U8.13 U9.13 | length 9599.9
  Top Layer w10: J10.13 555,1860 545,1850 545,1339.53 580,1304.53 625.47,1304.53 680,1250 U9.13
  vcc w10: U9.13 880,1250 920,1210 920,1155 940,1135 985,1135 1110,1260 U8.13
  gnd w10: U3.13 4821,1470 4871,1520 4871,2401 5708,3238 5708,4440 5758,4490 R15.1
  Bottom Layer w10: J10.13 843,1860 914,1789 3460,1789 3504,1833 4720,1833 4770,1783 4770,1480 4760,1470 U3.13
D7: J10.14 R14.1 U3.17 U8.15 U9.15 | length 8002.1
  Top Layer w10: U3.17 4725,1120 4785,1060 5920,1060 5972,1112 5972,2260 5987,2275 R14.1
  vcc w10: J10.14 625,1760 635,1750 635,1040 675,1000 785,1000 825,1040 U9.15 870,1180 883.26,1166.74 883.26,1140 908.26,1115 1039,1115 1114,1190 U8.15
  Bottom Layer w10: U8.15 1205,1040 1270,975 4680,975 4725,1020 U3.17
D8: R27.2 U3.18 | length 829.6
  vcc w10: U3.18 5529,1180 5615,1266 R27.2
D9: R28.2 U3.14 | length 4882.9
  gnd w10: U3.14 4575,1400 4535,1440 4535,1880 4652,1997 4780,1997 4823,2040 4823,4000 4777,4046 4440,4046 4377,4109 4377,4922 4400,4945 4920,4945 4945,4920 R28.2
D10: R29.2 U3.7 | length 825.9
  vcc w10: U3.7 4963,1330 5137,1504 5560,1504 5615,1559 R29.2
D11: R30.2 U3.8 | length 4036.3
  Top Layer w10: U3.8 4890,1260 4880,1270 4880,3265 4660,3485 4660,3788 4698,3826 4698,4520 5068,4890 R30.2
D12: R31.2 U2.13 | length 1754.9
  vcc w10: U2.13 4640,1430 4680,1470 4680,1775 4700,1795 5615,1795 R31.2
D13: R32.2 U2.14 | length 4573
  Top Layer w10: U2.14 4280,1500 4323,1543 4323,2400 4363,2440 4430,2440 4550,2560 4550,3063.45 4540,3073.45 4540,4016 4510,4046 4507,4046 4507,4892 4560,4945 5380,4945 5405,4920 R32.2
D14: R33.2 U2.7 | length 1880.2
  vcc w10: U2.7 4083,1570 4113,1600 4113,1768 4160,1815 5212,1815 5442,2045 R33.2
D15: R34.2 U2.8 | length 4972.9
  gnd w10: U2.8 4101,1640 4141,1680 4141,3803 4193,3855 4193,4425 4147,4471 4147,4922 4200,4975 5580,4975 5635,4920 R34.2
DA0: J5.35 R21.2 | length 4908.1
  Bottom Layer w10: R21.2 3120,4890 3200,4970 4080,4970 4127,4923 4127,4400 4177,4350 5089,4350 5723,3716 6240,3716 6300,3656 6300,2925 6320,2905 J5.35
DA1: J5.33 R16.2 | length 5132.5
  vcc w10: R16.2 2944,4890 3399,4435 3399,3882 3440,3841 4432,3841 4637,3636 6240,3636 6300,3576 6300,2825 6320,2805 J5.33
DA2: J5.36 R36.2 | length 7073.2
  vcc w10: R36.2 815,4840 857,4798 1720,4798 1812,4706 1812,4040 1862,3990 2640,3990 2760,3870 2760,3457 2800,3417 4600,3417 4653,3364 5312,3364 5356,3320 5356,3235 5400,3191 6080,3191 6132,3139 6132,2960 6187,2905 J5.36
DD0: J5.17 R26.2 | length 1560
  Bottom Layer w10: R26.2 5920,1140 5972,1192 5972,1880 6022,1930 6052,1930 6162,2040 6162,2050 6340,2050 6350,2040 J5.17
DD1: F1.2 J5.15 | length 1664.3
  vcc w10: F1.2 5800,2945 5904,2841 5904,2400 5949,2355 6280,2355 6300,2335 6300,1925 6320,1905 J5.15
DD2: J5.13 R23.2 | length 3181.9
  Top Layer w10: R23.2 6345,4890 6395,4840 6395,1820 6380,1805 J5.13
DD3: J5.11 R22.2 | length 1916.4
  vcc w10: v1(5572,1655) 6340,1655 6350,1665 J5.11
  gnd w10: v1(5572,1655) 5572,2700 5587,2715 R22.2
DD4: J5.9 R19.2 | length 3899.2
  gnd w10: R19.2 6085,4920 6150,4985 6460,4985 6475,4970 6475,1680 6400,1605 J5.9
DD5: J5.7 R18.2 | length 2137
  Top Layer w10: R18.2 5615,2530 5630,2545 6123,2545 6148,2520 6148,1400 6188,1360 6374.53,1360 6394.53,1380 6394.53,1490.47 6380,1505 J5.7
DD6: J5.5 R15.2 | length 3892.3
  Top Layer w10: R15.2 5910,4890 6257,4543 6257,4240 6297,4200 6301,4200 6341,4160 6341,3840 6221,3720 6215,3720 6205,3710 6205,1480 6225,1460 6330,1460 6350,1440 J5.5
DD7: J5.3 R14.2 | length 2122
  Bottom Layer w10: R14.2 5643,2275 5658,2260 5658,1246 5572,1160 5572,1120 5595,1097 6077,1097 6235,1255 6340,1255 6350,1265 J5.3
DD8: J5.4 R27.1 | length 261.9
  vcc w10: R27.1 6100,1370 6165,1305 J5.4
DD9: J5.6 R28.1 | length 4332
  gnd w10: R28.1 4945,4520 4977.56,4552.56 5920,4552.56 5970,4502.56 5970,4135 6144,3961 6144,1461 6200,1405 J5.6
DD10: J5.8 R29.1 | length 274.4
  vcc w10: R29.1 6085,1600 6180,1505 J5.8
DD11: J5.10 R30.1 | length 4484.5
  gnd w10: R30.1 5175,4520 5187.56,4532.56 5883.44,4532.56 5936,4480 5936,3040 5984,2992 6046,2992 6098,2940 6098,1400 6138,1360 6275,1360 6295,1380 6295,1590 6280,1605 J5.10
DD12: J5.12 R31.1 | length 288.8
  vcc w10: R31.1 6043,1835 6173,1705 J5.12
DD13: J5.14 R32.1 | length 3583.7
  gnd w10: J5.14 6220,1805 6185,1840 6185,4019 6280,4114 v1(6288,4114)
  Bottom Layer w10: R32.1 5529,4490 5619,4400 6248,4400 6288,4360 v1(6288,4114)
DD14: J5.16 R33.1 | length 312.3
  vcc w10: R33.1 6113,2045 6200,1958 6200,1925 6220,1905 J5.16
DD15: J5.18 R34.1 | length 3545.1
  Bottom Layer w10: R34.1 5635,4520 5648,4533 6362,4533 6415,4480 6415,2000 6370,1955 6260,1955 6250,1965 J5.18
DIOR: J5.25 R24.2 | length 4290.8
  gnd w10: R24.2 4420,4680 4467,4633 5925,4633 6038,4520 6038,4284 6122,4200 6301,4200 6341,4160 6341,3496 6305,3460 6305,2420 6320,2405 J5.25
DIOW: J5.23 R20.2 | length 4921.6
  vcc w10: R20.2 4190,4920 4215,4945 v1(6395,4945)
  gnd w10: J5.23 6380,2305 6395,2320 v1(6395,4945)
FCE1: U8.29 U9.29 | length 526.3
  vcc w10: U9.29 1055,1605 1180,1730 1240,1730 1250,1720 1250,1640 1275,1615 U8.29
FPRE: U8.31 U9.31 | length 446.8
  vcc w10: U9.31 1055,1675 1130,1750 1260,1750 1299,1711 1299,1696 1310,1685 U8.31
FRB: U8.27 U9.27 | length 1090.6
  gnd w10: U9.27 1081,1535 1136,1480 1136,1169 1160,1145 1240,1145 1271.62,1176.62 1271.62,1520 1296.62,1545 U8.27
FWE: U8.23 U9.23 | length 813.8
  Top Layer w10: U9.23 1120,1395 1160,1355 1160,1165 1180,1145 1240,1145 1270,1175 1270,1345 1300,1375 1300,1395 1310,1405 U8.23
GND: 1.2 C7.1 C8.1 C9.1 C10.1 C11.1 C12.1 C23.0 DS?.2 J1.5 J2.1 J3.4 J3.5 J4.1 J5.2 J5.20 J5.22 J5.24 J5.26 J5.30 J5.40 J7.1 J9.1 J9.1A J9.1B J10.1 J11.3 J12.1 J12.1A J12.1B R5.2 R39.2 R40.2 R41.2 U1.2 U7.4 U7.5 U10.6 U11.8 U11.10 U12.3 U12.6 U？.2 U？.14 U？.15 U？.20 U？.24 U？.34 U？.42 U？.52 U？.72 | length 29265.9
  Top Layer w10: U12.3 550,3595 540,3585 540,3080 560,3060 J10.1 ; U7.4 1780.4,3267.4 2060.28,3547.28 J9.1B J9.1 J9.1A ; U11.8 2440,4300 2430,4290 2430,3920 2480,3870 J11.3 ; U？.20 2924,2750 2914,2760 2914,2960 2929,2975 U？.15 U？.14 3314,3020 3334,3000 3334,2920 3210,2796 U？.24 3210,2160 3260,2110 C12.1 3605,2257 3610,2262 C7.1 3610,2444 3680,2514 3934,2514 4120,2700 ; U？.2 v1(3162,3540) ; U？.72 3465,3753 3405,3813 3405,4120 3455,4170 J4.1 ; U？.34 3700,2713 3663,2750 3663,2870 3632,2901 3632,3027 3680,3075 3743,3075 3905,2913 3905,2840 3950,2795 3990,2795 ; U？.42 3990,2795 ; U？.52 4120,3250 4185,3315 R40.2 4185,3482 4255,3552 C11.1 ; U10.6 4345,2710 4335,2700 4120,2700 ; C9.1 4375,4057 4455,4137 C8.1 ; J3.5 J3.4 ; 1.2 5040,3436.57 5000,3476.57 5000,4030 5010,4040 J3.4 ; J2.1 5790,3679 5863.46,3752.46 J1.5 5654,4066.54 5644,4076.54 U1.2 5257.54,4076.54 5221,4040 J3.4 ; J5.2 6250,1170 6260,1160 6394.53,1160 6414.53,1180 6414.53,1520 6374.53,1560 6320,1560 6300,1580 6300,2085 6280,2105 J5.20 J5.22 J5.24 J5.26 6250,2432 6295,2477 6295,2533 6250,2578 J5.30 ; 3990,2795 3979,2784 3979,2727 4006,2700 4120,2700
  vcc w10: U12.3 U12.6 ; U7.4 1780.4,3024.6 1880,2925 U7.5 ; U11.8 2475,4345 2615,4345 U11.10 ; J4.1 4080,4170 4150,4240 R41.2 4275,4285 4330,4230 C8.1 ; C9.1 4399,3965 4451,3913 4534,3913 4591,3970 C10.1 4674,3970 4726,3918 4836,3918 4958,4040 J3.4 ; J12.1A J12.1 J12.1B 5329.72,2475.28 5600,2205 J5.22 ; J2.1 5815,3365 5864,3316 5928,3316 6047,3435 R39.2
  gnd w10: C23.0 1109,3725 1200,3634 1200,2000 1220,1980 J7.1 ; U7.5 1880.4,2960 1895.4,2975 2600,2975 2665,3040 2665,3911 2640,3936 2560,3936 2530,3906 J11.3 ; R5.2 3675,4843 3740,4778 3740,4345 3800,4285 R41.2 ; C11.1 4255,3698 4282,3698 4282,3787 4375,3880 C9.1 ; U10.6 4345,1600 4385,1560 DS?.2 ; J5.30 6220,2605 6205,2620 6205,3090 6220,3105 J5.40
  Bottom Layer w10: J10.1 1499,3060 1509,3070 1700,3070 1745,3025 U7.4 ; U12.6 1000,3595 1045,3640 C23.0 ; J11.3 2530,3760 2750,3540 v1(3162,3540) 3162,3440 3234,3368 3793,3368 3796,3365 R40.2 ; U10.6 4345,2660 4400,2605 J5.30 ; R39.2 6200,3435 6250,3385 J5.40
"IDE RET": R17.1
"IDE RST": U？.79
iRST: J5.1 R17.2 | length 4643.2
  Bottom Layer w10: R17.2 2680,1555 2800,1435 2800,975 2840,935 6285,935 6350,1000 J5.1
"LCD  CS1": U6A.2 U6A.3 | length 82.8
  Top Layer w10: U6A.2 910,2117 965,2062 U6A.3
"LCD  CS2": U6B.2 U6B.3 | length 82.8
  Top Layer w10: U6B.2 2040,4282 2095,4227 U6B.3
"LCD  E": J10.6
"LCD  EL": J10.19
"LCD EL": U？.39
"LCD RST": U？.40
NetC2_0: C2.0 J12.2 J12.2A J12.2B | length 1314.9
  Top Layer w10: C2.0 4775,3260 4785,3250 4785,2577 v1(4765,2557)
  vcc w10: J12.2A J12.2 J12.2B
  Bottom Layer w10: v1(4765,2557) 4960,2557 5138.18,2378.82 J12.2A J12.2
NetC2_1: C2.1 R47.2 U12.5 | length 5518.1
  vcc w10: U12.5 935,3525 980,3480 980,2912 1040,2852 3705.5,2852 3757.5,2800 3757.5,2457.5 3800,2415 R47.2
  gnd w10: R47.2 4606,2415 4671,2480 4671,3041 4700,3070 C2.1
NetC3_0: C3.0 J12.4 J12.4A J12.4B | length 5741.3
  vcc w10: C3.0 1045,4240 1341,3944 1960,3944 2394,3510 2600,3510 2680,3430 2680,3220 2720,3180 4920,3180 5015.65,3084.35 5015.65,2200 5057.31,2158.35 J12.4A 5206.35,2158.35 J12.4 J12.4B
NetC3_1: C3.1 R48.2 U12.7 | length 1064.5
  vcc w10: R48.2 815,4285 1005,4095 C3.1
  gnd w10: R48.2 747,4285 732,4270 732,3693 760,3665 U12.7
NetC4_0: C4.0 R4.1 R39.1 U？.47 | length 6222.7
  Top Layer w10: R4.1 1161,2805 1236,2880 1236,3091 1280,3135 C4.0 ; U？.47 4240,3035 4280,3075 v1(4280,3287.72)
  vcc w10: v1(4280,3287.72) 4297.28,3305 5106,3305 5376,3035 R39.1
  gnd w10: C4.0 2408,3135 2473,3200 v1(2473,3305)
  Bottom Layer w10: v1(2473,3305) 3699.01,3305 3716.29,3287.72 v1(4280,3287.72)
NetC5_0: C5.0 U10.8 | length 2033.7
  vcc w10: v1(3953,2874) 4440,2874 4485,2829 U10.8
  gnd w10: C5.0 3560,1825 3580,1845 3840,1845 3953,1958 v1(3953,2874)
NetC5_1: C5.1 R40.1 R42.1 | length 2344.7
  Top Layer w10: C5.1 4240,1785 4280,1825 R42.1
  vcc w10: R42.1 v1(4505,2170)
  gnd w10: v1(4505,2170) 4505,2434 4585,2514 R40.1
NetC6_0: C6.0 U10.5 | length 1585.6
  gnd w10: U10.5 4275,2900 4230,2945 4230,3000 4320,3090 4320,3623 4307,3636 4307,3706 4340,3739 4573,3739 4705,3607 C6.0
NetC6_1: C6.1 R41.1 R43.1 | length 1021.4
  vcc w10: R41.1 4189,3885 4208,3866 4849,3866 4875,3840 R43.1 4760,3790 4705,3735 C6.1
NetC7_2: C7.2 J9.2 J9.2A J9.2B R42.2 | length 4714.8
  Top Layer w10: J9.2B J9.2 J9.2A ; C7.2 3710,2220 3760,2170 R42.2
  Bottom Layer w10: J9.2 J9.2B 1963.82,3507.82 1950,3494 1636,3494 1480,3650 1315,3650 1305,3640 1305,3253 1466,3092 1978,3092 2030,3040 2030,2673.91 2080,2623.91 3711.92,2623.91 3735.83,2600 3735.83,2534.72 3710,2508.9 C7.2
NetC8_2: C8.2 J9.4 J9.4A J9.4B R43.2 | length 5116.9
  Top Layer w10: J9.4B J9.4 J9.4A
  vcc w10: v1(2120,4847) 2194,4847 2280,4933 3543,4933 3596,4880 3596,4358 3640,4314 4090,4314 4105,4329 4506,4329 4555,4280 C8.2 4695,4230 4735,4190 R43.2
  gnd w10: J9.4 J9.4A 1743.35,3680.35 1780,3717 2097,3717 2140,3760 2140,4407 2120,4427 v1(2120,4847)
NetC9_2: C9.2 U？.17 X1.1 | length 3632.6
  Top Layer w10: U？.17 3073,2885 v1(3073,2893)
  vcc w10: v1(3073,2893) 3764.5,2893 3777.5,2880 3777.5,2483.52 3800,2461.02 X1.1
  gnd w10: X1.1 v1(4100,4082)
  Bottom Layer w10: v1(4100,4082) 4433,4082 4475,4040 C9.2
NetC10_2: C10.2 U？.16 X1.2 | length 3779.6
  Top Layer w10: U？.16 3023,2930 v1(3294,2950)
  vcc w10: v1(4042.02,4106.02) 4067,4131 4699,4131 4750,4080 C10.2
  gnd w10: v1(3294,2950) 3351,2893 3890,2893 3911,2914 4000,2914 4042.02,2871.98 ; v1(4042.02,4106.02) 4042.02,2871.98 ; X1.2 4063.05,2338.98 4042.02,2360 4042.02,2871.98
NetC11_2: C11.2 R44.1 | length 1936.3
  gnd w10: C11.2 4480,3670 4530,3620 4530,2592 4441,2503 4441,1976 4420,1955 R44.1
NetC12_2: C12.2 R44.2 U？.13 | length 2446.3
  Top Layer w10: U？.13 3330,3065 3355,3040 3355,2808 v1(3379,2784)
  vcc w10: C12.2 3705,2200 3760,2255 4325,2255 4390,2320 R44.2
  gnd w10: v1(3379,2784) 3379,2399 3440,2338 3647,2338 3705,2280 C12.2
NetC13_0: C13.0 J9.5 J9.5A J9.5B | length 383.7
  Top Layer w10: J9.5B J9.5 J9.5A
  vcc w10: C13.0 1520.71,3795 1595.71,3720 J9.5A J9.5
NetC13_1: C13.1 R45.1 | length 4779
  Bottom Layer w10: C13.1 1350,3560 1517,3393 1517,3158 1560,3115 3720,3115 3781,3054 3781,2120 3836,2065 R45.1
NetC14_0: C14.0 J9.3 J9.3A J9.3B | length 871.9
  Top Layer w10: C14.0 1450,4285 1440,4275 1440,4007 1780.82,3666.18 J9.3A J9.3 J9.3B
NetC14_1: C14.1 R46.1 | length 447.8
  Bottom Layer w10: R46.1 1215,4040 1270,4095 C14.1
NetC15_1: C15.1 U12.1 | length 362.1
  Top Layer w10: U12.1 585,3912 590,3917 C15.1
NetC22_1: C22.1 U11.1 | length 689.4
  Bottom Layer w10: U11.1 2475,4088 2500,4063 3100,4063 C22.1
NetC23_1: C23.1 U11.2 | length 2792.2
  Bottom Layer w10: C23.1 1080,3535 1122,3577 1122,4480 1194.56,4552.56 2320,4552.56 2368,4504.56 2368,4280 2410,4238 2480,4238 2545,4173 U11.2
NetC24_0: C24.0 U11.6 | length 2477.6
  Bottom Layer w10: C24.0 1897,4285 2144.56,4532.56 2205.44,4532.56 2218,4520 2218,4450 2215,4447 2215,4060 2235,4040 3125,4040 3145,4060 3145,4120 3090,4175 2840,4175 2825,4160 U11.6
NetC25_0: C25.0 U11.5 | length 619
  vcc w10: C25.0 2260,4230 2280,4210 2705,4210 2755,4160 U11.5
NetC25_1: C25.1 U11.4 | length 508.3
  vcc w10: C25.1 2260,4060 2665,4060 2685,4080 U11.4
NetD2_2: D2.2 R3.2 | length 2630.3
  vcc w10: R3.2 2175,4920 2215,4960 3966,4960 4156,4770 D2.2
NetDS?_1: DS?.1 R2.2 | length 1625.6
  Bottom Layer w10: R2.2 3876,1600 3916,1560 3916,1144 3960,1100 4525,1100 4585,1160 DS?.1
NetJ1_1: J1.1 J2.2 U1.1 | length 1524.1
  Top Layer w10: v1(5335,3510) U1.1 ; J2.2 5890,3480 6230,3820 6286.22,3820 J1.1
  Bottom Layer w10: v1(5335,3510) 5840,3510 5890,3460 J2.2
NetJ1_2: J1.2 J3.1 | length 1253.6
  vcc w10: J3.1 5280,3740 5681,4141 5977.97,4141 5987,4131.97 J1.2
NetJ3_2: J3.2 R38.2 | length 3991.8
  Bottom Layer w10: R38.2 2003,4890 2143,4750 3120,4750 3170,4700 3170,3920 3216.24,3873.76 3365.24,3873.76 3399,3840 J3.2
NetJ3_3: J3.3 R1.1 R37.2 | length 5644
  Top Layer w10: J3.3 5096,3940 5200,3836 5200,2905 5240,2865 R1.1
  Bottom Layer w10: R37.2 1715,4920 1730,4935 2263,4935 2278,4920 2278,4827 2320,4785 3360,4785 3410,4735 3410,4080 3477,4013 4400,4013 4423,3990 4423,3940 4446,3917 5045,3917 J3.3
NetJ4_2: J4.2 U？.38 | length 1836
  Top Layer w10: v1(3712.13,3035) 3712.13,2905.87 3880,2738 U？.38
  gnd w10: J4.2 3549.53,4270 3579.53,4240 3579.53,3974.47 3600,3954 3589.89,3585.55 3589.89,3080 3634.89,3035 v1(3712.13,3035)
NetJ4_3: J4.3 U？.37 | length 2500.8
  Top Layer w10: J4.3 3355,4370 3305,4320 3305,3780 3330,3755 3384,3755 3399,3740 3399,3639 3465,3573 3465,2980 3491,2954 3560,2954 3592,2922 3592,2768 3621,2739 3621,2560 3647,2534 3769,2534 3835,2600 U？.37
NetJ4_4: J4.4 U？.36 | length 2272.9
  Top Layer w10: v1(3672,2933) 3683,2933 3695,2758 3760,2758 3790,2728 U？.36
  gnd w10: v1(3509,4105) 3470,4105 3405,4040 3405,3000 3472,2933 v1(3672,2933)
  Bottom Layer w10: v1(3509,4105) 3540,4105 3560,4125 3560,4460 J4.4
NetJ4_5: J4.5 U？.35 | length 3571.8
  Top Layer w10: v1(3695,2574) 3720,2574 3745,2599 U？.35
  gnd w10: v1(3254,2574) 3254,3221 3295,3262 3295,4145 3363,4213 3363,4880 3416,4933 3520,4933 3560,4893 3560,4740 3540,4720 3490.47,4720 3470.47,4700 3470.47,4580 3480.47,4570 J4.5
  Bottom Layer w10: v1(3254,2574) v1(3695,2574)
NetJ4_6: J4.6 U？.50 | length 2154.1
  Top Layer w10: v1(3914,3034) 3914,3140 3934,3160 U？.50
  gnd w10: J4.6 3560,4670 3622,4608 3622,4307 3800,4129 3800,3874 3994,3680 3994,3080 3948,3034 v1(3914,3034)
NetJ4_7: J4.7 U？.49 | length 2159.7
  Top Layer w10: v1(3954,3115) U？.49
  gnd w10: J4.7 3480,4770 3450.47,4740.47 3450.47,4560 3490.47,4520 3559.53,4520 3599.53,4480 3599.53,4152.47 3700,4052 3700,3160 3745,3115 v1(3954,3115)
NetJ4_8: J4.8 U？.48 | length 2656.1
  Top Layer w10: v1(3940.31,2973.31) 3965,2998 3965,3060 3980,3075 U？.48
  gnd w10: J4.8 3480,4870 3430.47,4820.47 3430.47,4264.06 3480,4214.53 3559.53,4214.53 3559.53,4080 3505,4025.47 3505,3028.31 3560,2973.31 v1(3940.31,2973.31)
NetJ5_37: J5.37 R25.2 | length 4805.7
  vcc w10: R25.2 3388,4890 3438,4840 3438,4072 3480,4030 4160,4030 4299,3891 4882,3891 4973,3800 4973,3720 5013,3680 6355,3680 6395,3640 6395,3020 6380,3005 J5.37
NetJ5_38: J5.38 R35.2 | length 7426.5
  vcc w10: R35.2 585,4920 620,4955 1800,4955 1991,4764 2891,4764 2935,4720 2935,3640 2979,3596 3658.89,3596 6120,3585 6200,3505 6200,3025 6220,3005 J5.38
NetJ5_39: J5.39 R3.1 | length 6018.7
  Bottom Layer w10: R3.1 2175,3272 2240,3207 5883,3207 5930,3160 5930,2920 5990,2860 6375,2860 6395,2880 6395,3090 6380,3105 J5.39
NetJ6_1: J6.1 K4.2 K5.2 K6.2 U？.8 | length 3747.3
  Top Layer w10: K6.2 1437,4850 1447,4840 1447,4565 1420,4538 1420,3640 1480,3580 1600,3580 1620,3560 v1(1620,3240) ; J6.1 2651,3060 2861,3270 U？.8
  vcc w10: K4.2 K5.2 K6.2 ; v1(1620,3240) 1620,3120 1670,3070 2423,3070 2433,3060 J6.1
NetJ6_2: J6.2 K1.2 K2.2 K3.2 U？.7 | length 2751.3
  Top Layer w10: J6.2 2619,3160 2769,3310 U？.7
  vcc w10: K1.2 K2.2 K3.2
  gnd w10: K1.2 2270,4850 2220,4800 2220,4568 2388,4400 2388,3565 2537,3416 2537,3170 2547,3160 J6.2
NetJ6_3: J6.3 U？.6 | length 825.5
  Top Layer w10: v1(2861,3360) U？.6
  Bottom Layer w10: J6.3 2453,3260 2433,3280 2433,3363 2480,3410 2811,3410 v1(2861,3360)
NetJ6_4: J6.4 K1.1 K4.1 U？.5 | length 3417.7
  Top Layer w10: v1(2305,3389) 2305,4531 2355,4581 K1.1 ; J6.4 2585,3390 2600,3405 U？.5
  vcc w10: v1(2305,3389) 2334,3360 J6.4
  Bottom Layer w10: K4.1 1055,4600 1076.42,4578.58 2333.58,4578.58 2355,4600 K1.1
NetJ6_5: J6.5 K2.1 K5.1 U？.4 | length 3090.3
  Top Layer w10: J6.5 2775,3460 2785,3450 U？.4
  gnd w10: K2.1 2515,4440 2410,4335 2410,3665 2585,3490 J6.5
  Bottom Layer w10: K5.1 1225,4700 1246.42,4721.42 2415,4721.42 2456.42,4680 2456.42,4660 2466.42,4650 K2.1
NetJ6_6: J6.6 K3.1 K6.1 U？.3 | length 3562.9
  Top Layer w10: J6.6 2818,3560 2883,3495 2920,3495 ; K3.1 3080,4650 3127.56,4602.44 3127.56,4451.56 3027,4351 3027,3832.28 2899,3704.28 2899,3516 2920,3495 ; U？.3 2920,3495
  Bottom Layer w10: K6.1 1462.16,4650 1513.58,4701.42 2406.42,4701.42 2406.42,4600 2685,4590 K3.1
NetJ8_1: J8.1 U？.62 | length 254.5
  Top Layer w10: U？.62 3915,3787 3950,3822 J8.1
NetJ8_2: J8.2 U？.61 | length 490
  Top Layer w10: J8.2 3850,3959.53 3860,3969.53 3994.53,3969.53 3994.53,3740 3973.53,3719 3960,3719 U？.61
NetJ8_3: J8.3 U？.60 | length 985.2
  Top Layer w10: J8.3 3750,3987 3800,4037 4120,4037 4193,3964 4193,3718 4120,3645 U？.60
NetJ8_4: J8.4 U？.59 | length 938.8
  Top Layer w10: v1(3650,3459) 3804,3459 3957,3612 4006,3595 U？.59
  gnd w10: v1(3650,3459) 3650,3515.66 3670,3535.66 3670,3595.66 3650,3615.66 J8.4
NetJ8_5: J8.5 U？.65 | length 415
  Top Layer w10: J8.5 3550,3880 3591,3839 3720,3839 3790,3769 U？.65
NetJ8_6: J8.6 U？.66 | length 483.1
  Top Layer w10: J8.6 3450,3848.66 3516.66,3782 3723,3782 3745,3760 U？.66
NetJ8_7: J8.7 U？.67 | length 795.9
  Top Layer w10: v1(3350,3805) J8.7 ; v1(3630,3556) 3656,3556 3700,3600 U？.67
  Bottom Layer w10: v1(3350,3805) 3585,3805 3630,3760 v1(3630,3556)
NetJ8_8: J8.8 U？.68 | length 1695.5
  Top Layer w10: U？.68 3655,3630 3632,3630 3590,3588 3590,3382 3644,3328 v1(3756,3328)
  gnd w10: v1(3200,3345) 3250,3395 J8.8
  Bottom Layer w10: v1(3200,3345) 3739,3345 v1(3756,3328)
NetJ10_15: J10.15 U6B.1 | length 3650.7
  gnd w10: J10.15 555.47,1660 545.47,1670 545.47,2180 570.47,2205 680,2205 749,2274 749,3207 882,3340 882,3720 945,3783 1272,3783 1305,3750 1840,3750 1890,3800 U6B.1
NetJ10_16: J10.16 U6A.1 | length 588.6
  Bottom Layer w10: J10.16 555,1560 545,1570 545,1880 580,1915 U6A.1
NetJ11_1: J11.1 U11.14 | length 684.5
  Top Layer w10: J11.1 2630,3927 2735,4032 2887,4032 2935,4080 2935,4290 2925,4300 U11.14
NetJ11_2: J11.2 U11.13 | length 1001.1
  gnd w10: J11.2 2580,3831 2495,3836 2495,3920 2535,3960 2821,3960 2935,4074 2935,4160 2906,4189 2876,4189 2825,4240 U11.13
NetJ12_3: J12.3 J12.3A J12.3B | length 35.4
  vcc w10: J12.3A J12.3 J12.3B
NetJ12_5: J12.5 J12.5A J12.5B | length 35.4
  vcc w10: J12.5A J12.5 J12.5B
NetK?_1: K?.1 R4.2 | length 464
  Top Layer w10: R4.2 850,2995 920,2925 K?.1
NetLS?_1: LS?.1 LS?.1A | length 108.2
  Top Layer w10: LS?.1 5290,1272 5299.45,1281.45 LS?.1A
NetLS?_2: LS?.2 LS?.2A | length 108.2
  Top Layer w10: LS?.2 5290,1641.45 5299.45,1632 LS?.2A
NetR5_1: R5.1 S1.2 | length 2623.4
  Bottom Layer w10: S1.2 1565,4960 1626,5021 2636,5021 2840,4817 3618,4817 3675,4760 R5.1
NetR24_1: R24.1 U4.27 U6D.2 U？.32 | length 7368.1
  Top Layer w10: U4.27 2120,1620 2160,1660 v1(2160,2299) ; v1(3305,2299) 3526,2520 ; v1(3418,2286) 3480,2286 3526,2332 3526,2520 ; U？.32 3595,2589 3526,2520
  vcc w10: v1(2160,2299) v1(3305,2299) ; U6D.2 4268,4430 4328,4490 R24.1
  gnd w10: v1(3418,2286) 3344,2360 3212,2360 3172,2400 3172,2913 3085,3000 3085,3910 3175,4000 3175,4137 3318,4280 3318,4915 3360,4957 3762,4957 3778,4941 3778,4480 3828,4430 U6D.2
NetR25_1: R25.1 U7.10 | length 2861
  gnd w10: U7.10 2080.4,3080 2109.4,3109 2600,3109 2630,3139 2630,3634 2430,3834 2430,4320 2455,4345 3220,4345 3275,4400 R25.1
NetR35_1: R35.1 U7.14 | length 3301.8
  Top Layer w10: R35.1 621,4490 720,4391 720,3484 760,3444 1083,3444 1127,3400 1127,3056 v1(1080,3009)
  vcc w10: v1(1080,3009) 1120,3009 1249,2880 2015,2880 2035,2900 2035,2960 2055,2980 2270.4,2980 U7.14
NetR37_1: R37.1 U？.21 | length 4824.6
  Top Layer w10: R37.1 1715,4661 1760,4706 2409,4706 2435,4680 2435,4580 2480,4535 3092.56,4535 3107.56,4520 3107.56,4460 3095,4447.44 3020,4447.44 3003,4430.44 3003,3844 2960,3801 2581,3801 2540,3760 2540,2560 2591,2509 3000,2509 3045,2554 U？.21
NetR38_1: R38.1 U？.22 | length 3316.2
  Top Layer w10: v1(2445,4435) 2410,4400 2410,2554 2480,2484 3080,2484 3105,2509 U？.22
  vcc w10: R38.1 1945,4460 1970,4435 v1(2445,4435)
NetR45_2: R45.2 R47.1 U12.8 | length 5349.1
  Top Layer w10: R47.1 4612,2015 4780,2183 R45.2
  vcc w10: U12.8 960,3735 1369,3326 2122,3326 2343,3105 3760,3105 3845.93,3019.07 3845.93,2560 3890.93,2515 4760,2515 4780,2495 R45.2
NetR46_2: R46.2 R48.1 U12.4 | length 1521.7
  gnd w10: U12.4 585,3479 620,3444 800,3444 860,3504 860,3840 815,3885 R48.1 775,4048 967,4240 1205,4240 1215,4250 R46.2
NetS1_1: S1.1 U？.1 | length 3391.9
  Top Layer w10: S1.1 1513,4660 1513,4920 1558,4965 3103,4965 3148,4920 3148,3893.28 2975,3720.28 U？.1
NetU2_1: U2.1 U3.1 | length 1565.4
  vcc w10: U2.1 4030,1100 4080,1050 4720,1050 4784,1114 4784,1547 4875,1638 4885,1750 U3.1
NetU2_11: U2.11 U3.11 | length 768.1
  Bottom Layer w10: U2.11 4480,1290 4535,1345 4535,1585 4560,1610 U3.11
NetU10_1: U10.1 U？.43 | length 556.6
  Top Layer w10: U？.43 4445,2840 4485,2880 U10.1
NetU10_2: U10.2 U？.44 | length 442.4
  Top Layer w10: U？.44 4385,2890 4415,2920 U10.2
NetU10_3: U10.3 U？.45 | length 348.3
  Top Layer w10: U？.45 4138,2940 4148,2930 4335,2930 4345,2940 U10.3
NetU10_4: U10.4 U？.46 | length 241.2
  Top Layer w10: U？.46 4150,2990 4165,2975 U10.4
P1.6: J7.8 U？.9 | length 2208.3
  Top Layer w10: v1(2791.73,2680) 2791.73,3136.73 2880,3225 U？.9
  vcc w10: J7.8 v1(2791.73,2680)
P1.7: J7.7 U？.10 | length 2289.5
  Top Layer w10: v1(2868,2580) 2868,3133 2920,3185 U？.10
  Bottom Layer w10: J7.7 v1(2868,2580)
P3.2: J7.6
P3.3: J7.5
P3.4: J7.4
P3.5: J7.3
P5.1: J7.2 U？.80 | length 4171.2
  Top Layer w10: U？.80 3045,3618 3080,3583 3320,3583 3376,3527 3376,2917.5 3505,2788.5 v1(3505,2735)
  vcc w10: J7.2 3488,2080 3505,2097 v1(3505,2735)
PRE: U8.21 U9.21 | length 974.5
  Top Layer w10: U9.21 930,1320 920,1310 920,1132 960,1092 1362,1092 1390,1120 1390,1320 1380,1330 U8.21
TXD: U11.11
VCC: 1.1 C4.1 C24.1 D2.1 J10.2 K?.2 R1.2 R2.1 R6.1 R7.1 R8.1 R9.1 R10.1 R11.1 R12.1 R13.1 U1.3 U8.25 U9.25 U10.7 U12.2 U？.11 U？.12 U？.19 U？.23 U？.33 U？.41 U？.51 U？.71 | length 21192
  Top Layer w10: U12.2 620,3665 635,3650 635,2970 625,2960 J10.2 ; U？.19 3021,2795 ; U？.11 U？.12 2919,3105 2894,3080 2894,2740 2914,2720 3016,2720 3036,2740 3036,2780 3021,2795 ; R8.1 3175,1361 3222,1408 3222,1669 3140,1751 R11.1 3140,2011 3187,2058 3187,2431 3160,2458 U？.23 3160,2755 3120,2795 3021,2795 ; U？.71 3510,3255 ; U？.33 3650,2721.12 3643,2721.12 3643,2850 3620,2873 3612,2873 3612,2942.5 3580,2974.5 3560,2974.5 3510,3024.5 3510,3255 ; R2.1 3745,1200 3705,1240 3705,1844 4158,2297 4158,2367 4415,2624 4415,2705 ; U？.41 4130,2750 4170,2790 4415,2790 U10.7 4415,2705 ; v1(4300,4720) 4300,3960 4403,3857 4403,3456 4308,3361 4249,3361 4228,3340 4228,3320 ; 1.1 5075,2839 5100,2814 5440,2814 5463,2837 5463,3252 5450,3265 R1.2 5420,3396 5535,3511 U1.3 ; 3510,3255 3560,3205 U？.51 4113,3205 4228,3320 ; 4228,3320 4253,3345 4300,3345 4323,3322 4323,3207 4530,3000 4530,2715 4520,2705 4415,2705
  vcc w10: K?.2 1115,3125 1295,2945 C4.1 ; U8.25 1380,1475 1400,1455 1400,1240 1440,1200 2534,1200 2539,1195 R6.1 3005,1195 3015,1185 R8.1 3275,1185 3305,1155 R10.1 3490,1155 3520,1125 R12.1 3682,1125 3757,1200 R2.1 ; R7.1 R9.1 R11.1 3235,1835 3255,1855 R13.1
  gnd w10: U9.25 1051,1465 1116,1400 1116,1149 1140,1125 1284,1125 1299,1140 1299,1464 1310,1475 U8.25 1380,1475 1390,1485 1390,2935 1380,2945 C4.1
  Bottom Layer w10: J10.2 555,2960 545,2970 545,3100 570,3125 K?.2 1200,3125 1247,3172 1247,3680 1317,3750 1655,3750 1705,3800 C24.1 ; v1(4300,4720) 4770,4720 4780,4730 D2.1 ; U10.7 4415,2840 4458.43,2883.43 1.1
pads on no net: C15.0 C22.0 J1.MH1 J5.19 J5.21 J5.27 J5.28 J5.29 J5.31 J5.32 J5.34 J10.3 J10.17 J10.18 J10.20 R6.2 R7.2 R8.2 R9.2 R10.2 R11.2 R12.2 R13.2 U2.2 U2.5 U2.6 U2.9 U2.10 U2.12 U2.15 U2.16 U2.19 U3.2 U3.5 U3.6 U3.9 U3.10 U3.12 U3.15 U3.16 U3.19 U4.11 U4.12 U4.13 U4.14 U4.15 U4.16 U4.17 U4.18 U4.19 U4.22 U6D.1 U7.7 U7.8 U7.9 U7.11 U7.12 U7.13 U11.3 U11.7 U11.9 U11.12 U？.18 U？.25 U？.26 U？.27 U？.28 U？.29 U？.30 U？.53 U？.54 U？.55 U？.56 U？.57 U？.58 U？.63 U？.64 U？.69 U？.70 U？.73 U？.74 U？.75 U？.76 U？.77 U？.78

## Text inside footprints (layer, text, board x,y; h text height)
1: Top Overlay "+" at 5038.58,2863.74 h59.06 r90
J1: Mechanical 1 "Alert PCB fab to slot details" at 5738.98,4260.31 h11.81; Mechanical 1 "Slot 1.2x2.5mm, PTH" at 5738.98,4240.63 h11.81; Mechanical 1 "Assign keep-out area to slot" at 5738.98,4280 h11.81; Mechanical 1 "Mech 1 - Slot cut-out" at 5738.98,4220.94 h11.81; Mechanical 1 "Mech 2 - Clearance, move to internal plane if present" at 5738.98,4201.26 h11.81
J5: Top Overlay "39" at 6370,3185 h50 r90; Top Overlay "40" at 6270,3185 h50 r90; Top Overlay "2" at 6270,1105 h50 r90; Top Overlay "1" at 6370,1105 h50 r90
J9: Mechanical 1 "Mech 2 - Clearance, move to internal plane if present" at 2279.72,3899.49 h11.81 r270; Mechanical 1 "Mech 1 - Slot cut-out" at 2299.41,3899.49 h11.81 r270; Mechanical 1 "Assign keep-out area to slot" at 2358.46,3899.49 h11.81 r270; Mechanical 1 "Slot 1x1.9mm, PTH" at 2319.09,3899.49 h11.81 r270; Mechanical 1 "Alert PCB fab to slot details" at 2338.78,3899.49 h11.81 r270
J12: Mechanical 1 "Mech 2 - Clearance, move to internal plane if present" at 4890.51,2694.72 h11.81; Mechanical 1 "Mech 1 - Slot cut-out" at 4890.51,2714.41 h11.81; Mechanical 1 "Assign keep-out area to slot" at 4890.51,2773.46 h11.81; Mechanical 1 "Slot 1x1.9mm, PTH" at 4890.51,2734.09 h11.81; Mechanical 1 "Alert PCB fab to slot details" at 4890.51,2753.78 h11.81
U7: Top Overlay "13" at 2360.4,2905 h50; Top Overlay "14" at 2360.4,3005 h50; Top Overlay "1" at 1560.4,2905 h50; Top Overlay "2" at 1560.4,3005 h50